# Altium PCB hub_6.PcbDoc
Units mil, origin at the board's own origin, x right, y up, seen from the top; angles counter-clockwise.
Board outline 6000 x 4000 mil, 2 copper layers (Top Layer, Bottom Layer); 138 components, 100 nets, 461 pads, 145 vias.
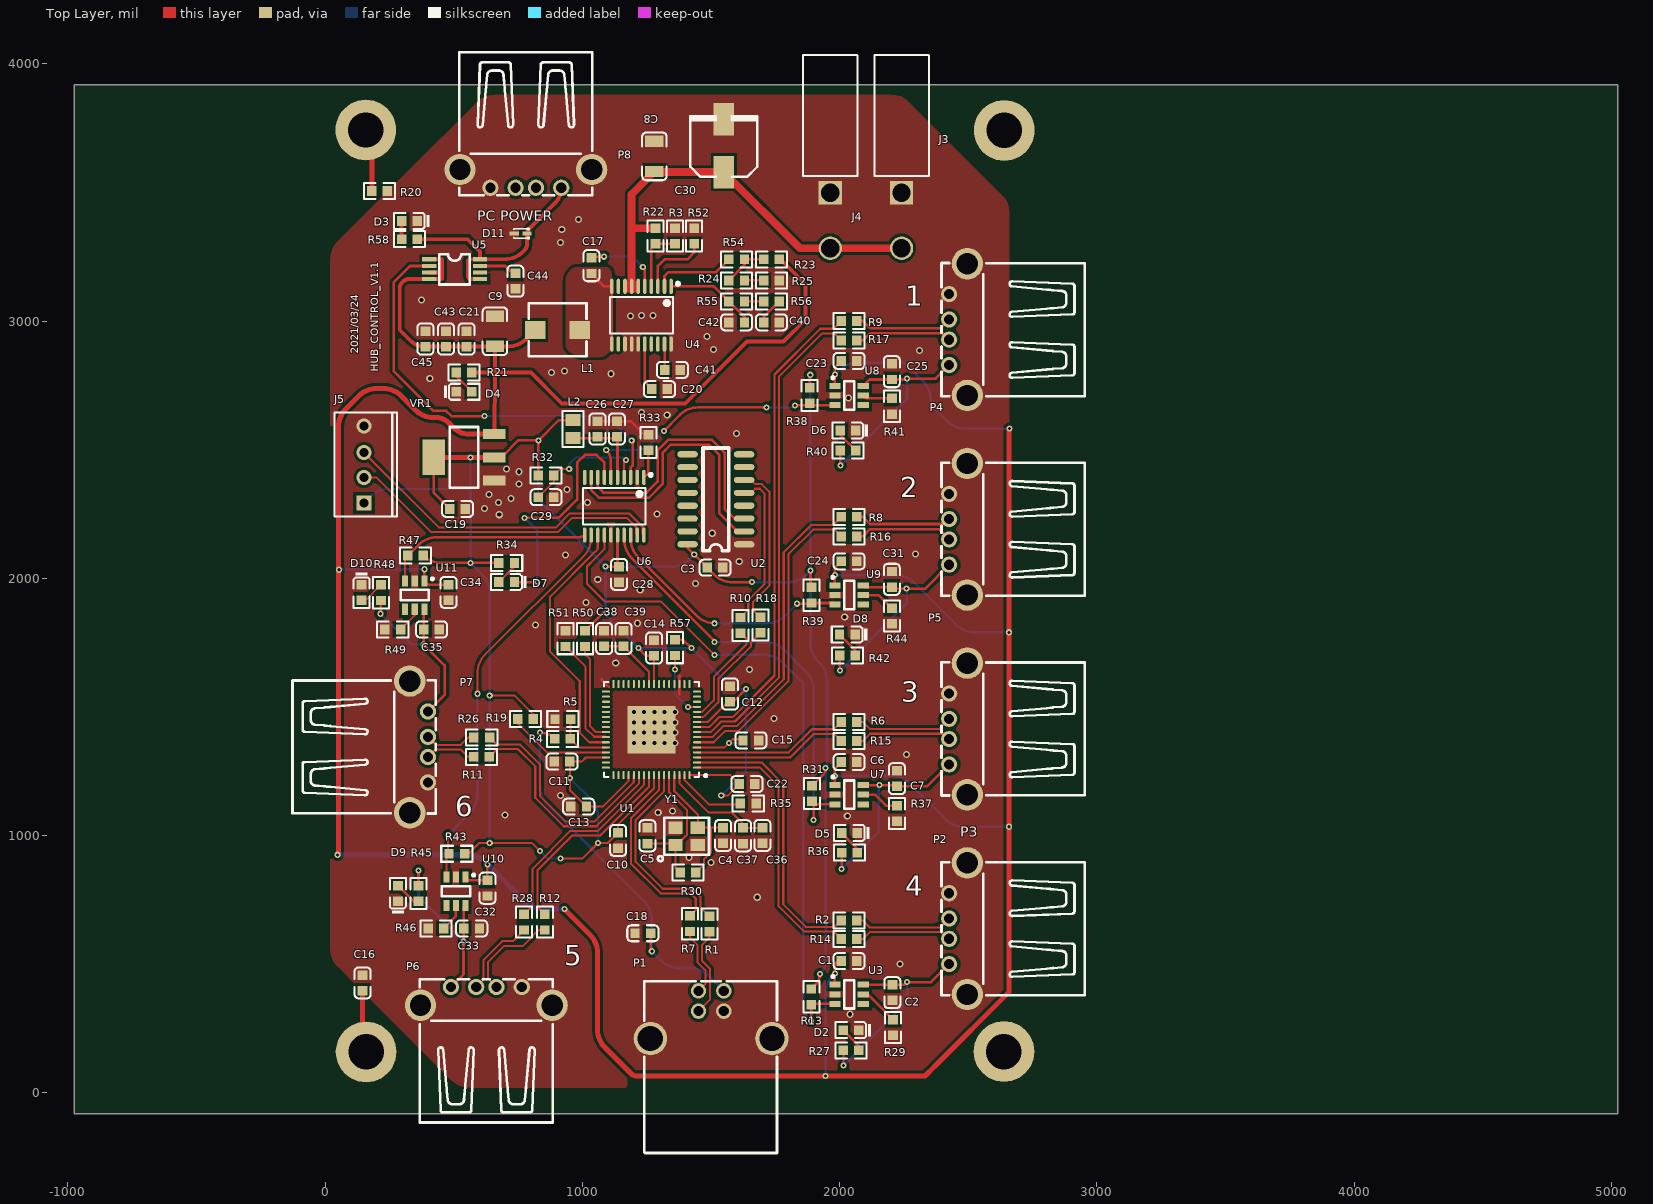
[diagram p0: Top Layer view]
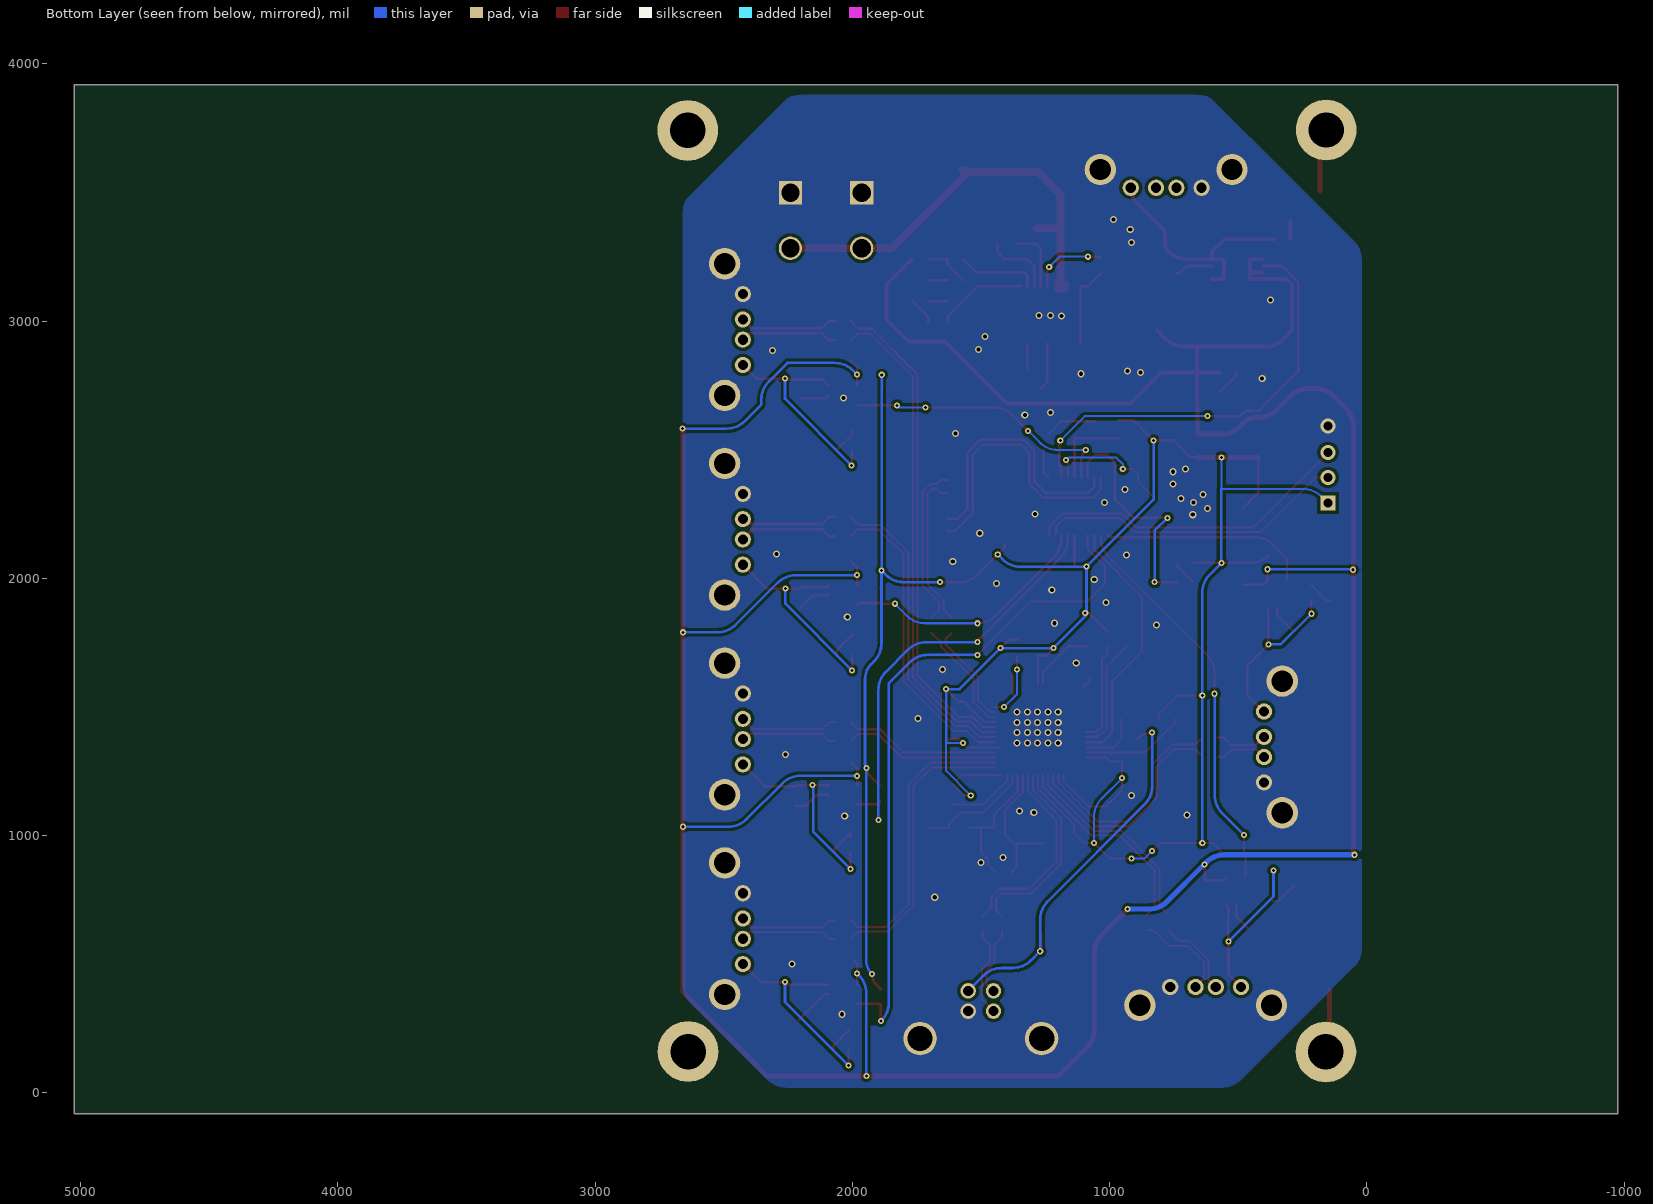
[diagram p1: Bottom Layer view, seen from below]
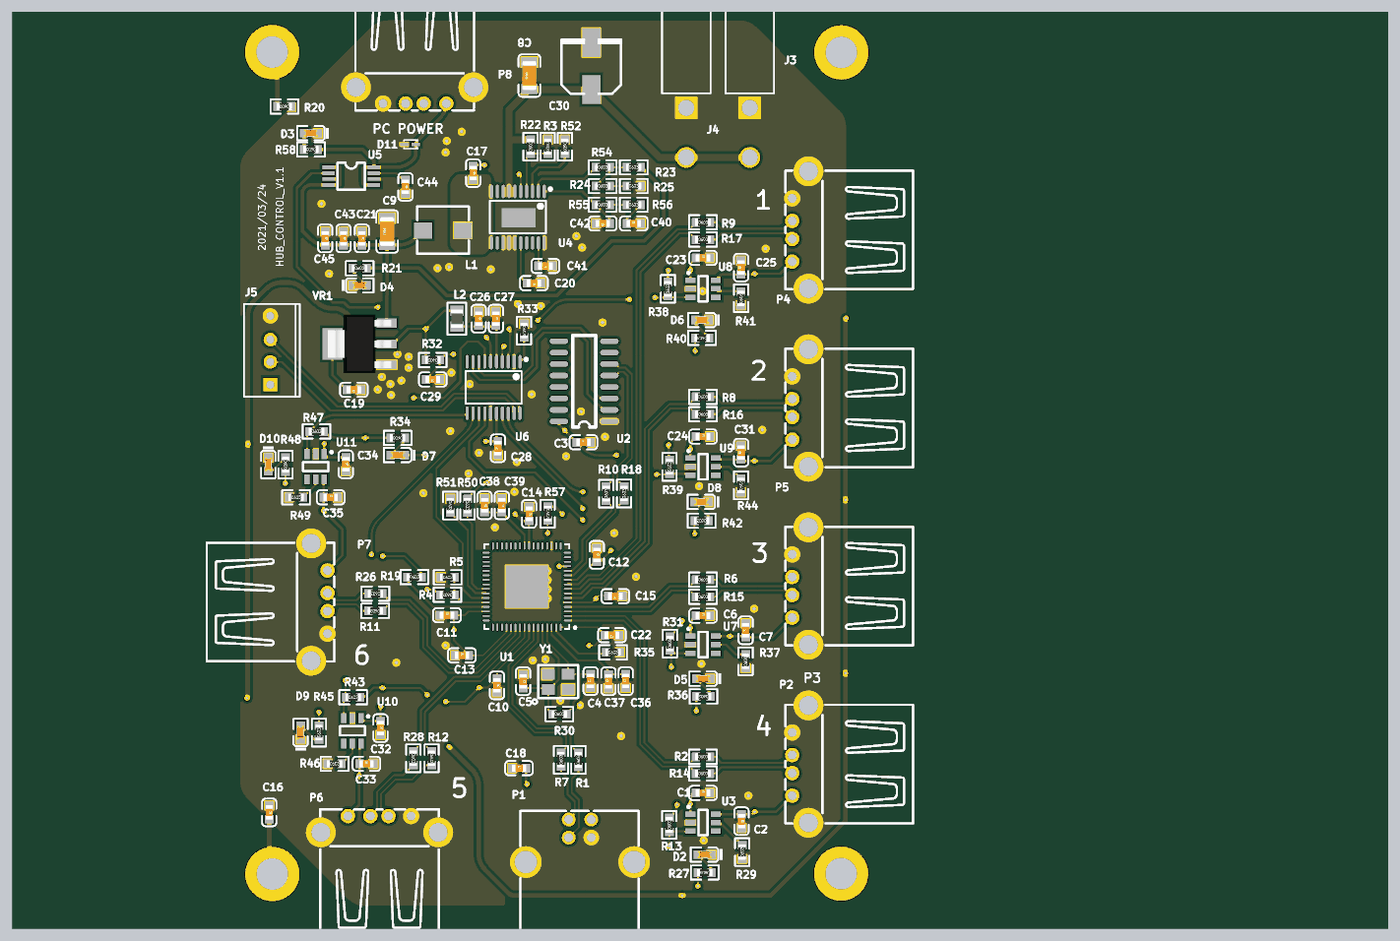
[diagram p2: 3D render of the assembled board from above, using the file's embedded part models]

## Layer stack, top to bottom
Top Layer: signal copper 1.4
Dielectric: dielectric 12.6, FR-4, Dk 4.8
Bottom Layer: signal copper 1.4

## Board outline
-975,-81 5025,-81 5025,3919 -975,3919

## Design rules (kind name [scope] priority, off if disabled: settings)
Clearance [InPolygon] p1: gap=12
Clearance Clearance_1 [All] p2: gap=10
PolygonConnect [All] p1: connectstyle=Direct reliefconductorwidth=10 reliefentries=2 polygonreliefangle="90 Angle"
RoutingVias [All] p1: holewidth=11.81 width=23.62 viastyle="Through Hole" minholewidth=11.81 minwidth=23.62 maxholewidth=28 maxwidth=50
SilkscreenOverComponentPads [All] p1: minsilkscreentomaskgap=10
SolderMaskExpansion [All] p1: expansion=4
Width [All] p1: maxlimit=50 minlimit=8 preferedwidth=8
27 further rules are at their usual default settings.

## Classes and differential pairs
component class RST_SER_1: C3 C8 C9 C16 C17 C19 C20 C21 C26 C27 C28 C29 C30 C40 C41 C42 C43 C44 C45 D3 D4 D7 D11 J3 J4 J5 L1 L2 P8 R3 R20 R21 R22 R23 R24 R25 R32 R33 R34 R52 R54 R55 R56 R58 U2 U4 U5 U6 VR1
component class USB2517: C1 C2 C4 C5 C6 C7 C10 C11 C12 C13 C14 C15 C18 C22 C23 C24 C25 C31 C32 C33 C34 C35 C36 C37 C38 C39 D2 D5 D6 D8 D9 D10 P1 P2 P3 P4 P5 P6 P7 R1 R2 R4 R5 R6 R7 R8 R9 R10 R11 R12 R13 R14 R15 R16 R17 R18 R19 R26 R27 R28 R29 R30 R31 R35 R36 R37 R38 R39 R40 R41 R42 R43 R44 R45 R46 R47 R48 R49 R50 R51 R57 U1 U3 U7 U8 U9 U10 U11 Y1

## Components (designator, comment, footprint, x,y, rotation, side; value= is the part's Value field where it differs from the comment)
C1 "100nF (104) 10% 50V" 0603_C 2037,512 r0 top
C2 "1uF (105) 10% 50V" 0603_C 2205,389 r270 top
C3 "100nF (104) 10% 50V" 0603_C 1516,2041 r0 top
C4 "33pF (330) 5% 50V" 0603_C 1547,1000 r90 top
C5 "33pF (330) 5% 50V" 0603_C 1253,999 r270 top
C6 "100nF (104) 10% 50V" 0603_C 2037,1285 r0 top
C7 "1uF (105) 10% 50V" 0603_C 2223,1221 r90 top
C8 "1uF  50V" 1206_C 1280,3640 r90 top
C9 "22UF/25V" 1206_C 660,2960 r90 top
C10 "100nF (104) 10% 50V" 0603_C 1139,981 r270 top
C11 "100nF (104) 10% 50V" 0603_C 921,1287 r0 top
C12 "100nF (104) 10% 50V" 0603_C 1574,1550 r270 top
C13 "100nF (104) 10% 50V" 0603_C 986,1112 r0 top
C14 "100nF (104) 10% 50V" 0603_C 1279,1729 r270 top
C15 "100nF (104) 10% 50V" 0603_C 1655,1370 r180 top
C16 "1uF (105) 10% 50V" 0603_C 146,427 r270 top
C17 "100nF (104) 10% 50V" 0603_C 1035,3215 r270 top
C18 "4.7uF (475) 10% 16V" 0603_C 1235,620 r0 top
C19 "100nF" 0603_C 515,2270 r180 top
C20 "1uF (105) 10% 50V" 0603_C 1300,2735 r180 top
C21 "10uF" 0603_C 550,2930 r270 top
C22 "100nF (104) 10% 50V" 0603_C 1640,1200 r180 top
C23 "100nF (104) 10% 50V" 0603_C 2037,2845 r0 top
C24 "100nF (104) 10% 50V" 0603_C 2037,2066 r0 top
C25 "1uF (105) 10% 50V" 0603_C 2203,2803 r90 top
C26 "100nF" 0603_C 1059,2580 r270 top
C27 "10uF" 0603_C 1134,2580 r270 top
C28 "100nF" 0603_C 1143,2015 r90 top
C29 "10nF" 0603_C 859,2315 r180 top
C30 "100uf" E_6.3*5.4 1550,3579 r90 top
C31 "1uF (105) 10% 50V" 0603_C 2203,1996 r90 top
C32 "100nF (104) 10% 50V" 0603_C 631,795 r270 top
C33 "1uF (105) 10% 50V" 0603_C 570,639 r0 top
C34 "100nF (104) 10% 50V" 0603_C 480,1945 r270 top
C35 "1uF (105) 10% 50V" 0603_C 414,1801 r0 top
C36 "100nF (104) 10% 50V" 0603_C 1700,1000 r90 top
C37 "1uF (105) 10% 50V" 0603_C 1625,999 r90 top
C38 "100nF (104) 10% 50V" 0603_C 1085,1766 r270 top
C39 "1uF (105) 10% 50V" 0603_C 1160,1766 r270 top
C40 "2.7nF (272) 10% 50V" 0603_C 1735,2995 r0 top
C41 "100nF (104) 10% 50V" 0603_C 1350,2810 r180 top
C42 "18pF (180) 5% 50V" 0603_C 1600,2995 r180 top
C43 "1uF (105) 10% 50V" 0603_C 470,2930 r270 top
C44 "220nF (224) 10% 25V" 0603_C 740,3155 r270 top
C45 "100nF (104) 10% 50V" 0603_C 390,2930 r270 top
D2 "绿灯 0603" 0603_LED_S1 2044,243 r180 top
D3 "绿灯 0603" 0603_LED_S1 328,3389 r180 top
D4 "红灯 0603" 0603_LED_S1 540,2725 r0 top
D5 "绿灯 0603" 0603_LED_S1 2038,1010 r180 top
D6 "绿灯 0603" 0603_LED_S1 2033,2574 r180 top
D7 "绿灯 0603" 0603_LED_S1 706,1985 r180 top
D8 "绿灯 0603" 0603_LED_S1 2030,1781 r180 top
D9 "绿灯 0603" 0603_LED_S1 283,775 r90 top
D10 "绿灯 0603" 0603_LED_S1 142,1944.69 r270 top
D11 "TVS" SOD-523 735,3340 r0 top
J3 "MOTOR" 5557 2241,3283 r90 top
J4 "MOTOR" 5557 1964,3283 r90 top
J5 "header4" xh-4 151,2292 r90 top
L1 "induct" L_SMD,5.7x5.2mm 990,2965 r180 top
L2 "1uH ±10%" 0805_L 964,2580 r270 top
P1 "USB1" USB-B-TH_USB-B01 1550,396 r180 top
P2 "USB1" "USB-A-TH_AF90-OFFSET - duplicate" 2426,500 r90 top
P3 "USB1" "USB-A-TH_AF90-OFFSET - duplicate" 2426,1276.33 r90 top
P4 "USB1" "USB-A-TH_AF90-OFFSET - duplicate" 2426,2829 r90 top
P5 "USB1" "USB-A-TH_AF90-OFFSET - duplicate" 2426,2052.67 r90 top
P6 "USB1" "USB-A-TH_AF90-OFFSET - duplicate" 489,411 r0 top
P7 "USB1" "USB-A-TH_AF90-OFFSET - duplicate" 400,1482 r270 top
P8 "USB1" "USB-A-TH_AF90-OFFSET - duplicate" 918,3518 r180 top
R1 "27Ω (27R0) ±1%" 0603_R 1494,656 r90 top
R2 "27Ω (27R0) ±1%" 0603_R 2037,670 r0 top
R3 "20KΩ (2002) ±1%" 0603_R 1360,3330 r270 top
R4 "100KΩ (1003) ±1%" 0603_R 923,1376 r180 top
R5 "100KΩ (1003) ±1%" 0603_R 924,1452 r0 top
R6 "27Ω (27R0) ±1%" 0603_R 2037,1442 r0 top
R7 "27Ω (27R0) ±1%" 0603_R 1418,657 r90 top
R8 "27Ω (27R0) ±1%" 0603_R 2037,2239 r0 top
R9 "27Ω (27R0) ±1%" 0603_R 2037,3000 r0 top
R10 "27Ω (27R0) ±1%" 0603_R 1615,1817 r90 top
R11 "27Ω (27R0) ±1%" 0603_R 608,1306 r180 top
R12 "27Ω (27R0) ±1%" 0603_R 854,663 r270 top
R13 "10KΩ (1002) ±1%" 0603_R 1890,373 r90 top
R14 "27Ω (27R0) ±1%" 0603_R 2037,597 r0 top
R15 "27Ω (27R0) ±1%" 0603_R 2037,1367 r0 top
R16 "27Ω (27R0) ±1%" 0603_R 2037,2163 r0 top
R17 "27Ω (27R0) ±1%" 0603_R 2037,2925 r0 top
R18 "27Ω (27R0) ±1%" 0603_R 1693,1817.68 r90 top
R19 "4.7KΩ (4701) ±1%" 0603_R 779,1453 r0 top
R20 "1MΩ (1004) ±1%" 0603_R 212,3505 r180 top
R21 "10KΩ" 0603_R 540,2800 r0 top
R22 "200KΩ (2003) ±1%" 0603_R 1285,3330 r90 top
R23 "20KΩ (2002) ±1%" 0603_R 1735,3240 r0 top
R24 "2.4KΩ (2401) ±1%" 0603_R 1600,3158.33 r0 top
R25 "2.2KΩ (2201) ±1%" 0603_R 1735,3158.33 r0 top
R26 "27Ω (27R0) ±1%" 0603_R 609,1381 r180 top
R27 "4.7KΩ (4701) ±1%" 0603_R 2045,165 r180 top
R28 "27Ω (27R0) ±1%" 0603_R 774,663 r270 top
R29 "27KΩ (2702) ±1%" 0603_R 2208,254 r90 top
R30 "1MΩ (1004) ±1%" 0603_R 1411,856 r0 top
R31 "10KΩ (1002) ±1%" 0603_R 1893,1163 r90 top
R32 "10KΩ" 0603_R 859,2400 r180 top
R33 "4.7KΩ (4701) ±1%" 0603_R 1257,2528 r270 top
R34 "4.7KΩ" 0603_R 706,2060 r180 top
R35 "12KΩ (1202) ±1%" 0603_R 1645,1125 r0 top
R36 "4.7KΩ (4701) ±1%" 0603_R 2039,933 r180 top
R37 "27KΩ (2702) ±1%" 0603_R 2223,1086 r90 top
R38 "10KΩ (1002) ±1%" 0603_R 1884,2710 r90 top
R39 "10KΩ (1002) ±1%" 0603_R 1891,1934 r90 top
R40 "4.7KΩ (4701) ±1%" 0603_R 2033,2496 r180 top
R41 "27KΩ (2702) ±1%" 0603_R 2203,2668.68 r90 top
R42 "4.7KΩ (4701) ±1%" 0603_R 2031,1699 r180 top
R43 "10KΩ (1002) ±1%" 0603_R 512,929 r0 top
R44 "27KΩ (2702) ±1%" 0603_R 2203,1853 r90 top
R45 "4.7KΩ (4701) ±1%" 0603_R 363,775 r90 top
R46 "27KΩ (2702) ±1%" 0603_R 431,639 r0 top
R47 "10KΩ (1002) ±1%" 0603_R 352,2088 r0 top
R48 "4.7KΩ (4701) ±1%" 0603_R 217,1943.69 r270 top
R49 "27KΩ (2702) ±1%" 0603_R 263,1801 r0 top
R50 "4.7KΩ (4701) ±1%" 0603_R 1010,1765 r270 top
R51 "4.7KΩ (4701) ±1%" 0603_R 935,1765 r270 top
R52 "56KΩ (5602) ±1%" 0603_R 1435,3330 r270 top
R54 "0Ω (0R0) ±1%" 0603_R 1600,3240 r0 top
R55 "3KΩ (3001) ±1%" 0603_R 1600,3076.67 r0 top
R56 "3KΩ (3001) ±1%" 0603_R 1735,3076.67 r0 top
R57 "4.7KΩ (4701) ±1%" 0603_R 1360,1730 r270 top
R58 "4.7KΩ (4701) ±1%" 0603_R 328,3318 r180 top
U1 "USB2517" QFN-64 1446,1264 r180 top
U2 "CH340C" SOP-16 1518,2257 r180 top
U3 "TPS2553DBVT" SOT-23-6 2067,345 r0 top
U4 "MP4575" TSSOP-20#1 1345,3135 r180 top
U5 "TPS22958DGKR" MSOP-8 405,3240 r0 top
U6 "STM32F030F4P6" TSSOP-20#2 1124,2280 r180 top
U7 "TPS2553DBVT" SOT-23-6 2067,1121 r0 top
U8 "TPS2553DBVT" SOT-23-6 2067,2673 r0 top
U9 "TPS2553DBVT" SOT-23-6 2067,1897 r0 top
U10 "TPS2553DBVT" SOT-23-6 471,753 r270 top
U11 "TPS2553DBVT" SOT-23-6 311,1905 r270 top
VR1 "ZLDO1117QG33TA" SOT-223 540,2470 r0 top
Y1 "OSC-24M" SMD-3225_4P 1418.49,990.01 r0 top

## Footprints (in the part's own frame and the unit in brackets; to place one, negate y for a bottom-side part, rotate by r counter-clockwise, add the part's x,y. Pads: shape width x height; smd on the part's side, far side on the other; paste and mask are expansions set on the pad)
0603_C [mm]
  rect 0.93x0.98 smd: 1(-0.77,0) 2(0.77,0)
  silkscreen extent -1.53,-0.79 1.54,0.79, body extent -0.8,-0.4 0.8,0.4, height 0.3
0603_LED_S1 [mm]
  rect 0.93x0.98 smd: A(0.77,0) K(-0.77,0)
  silkscreen extent -1.98,-0.79 1.54,0.79, body extent -0.8,-0.4 0.8,0.4, height 0.6
0603_R [mm]
  rect 0.93x0.98 smd: 1(-0.77,0) 2(0.77,0)
  silkscreen extent -1.53,-0.79 1.54,0.79, body extent -0.85,-0.4 0.85,0.4, height 0.56
0805_L [mm]
  rect 1.16x1.47 smd: 1(-0.89,0) 2(0.89,0)
  silkscreen extent -1.77,-1.04 1.77,1.03, body extent -1.02,-0.64 1.03,0.64, height 0.6
1206_C [mm]
  rect 1.13x1.8 smd: 1(-1.49,0) 2(1.49,0)
  silkscreen extent -2.36,-1.2 2.35,1.2, body extent -1.6,-0.81 1.6,0.79, height 1
5557 [mm]
  rect 2.3x2.3 hole 1.8: 1(5.486,0)
  round 2.3 hole 1.8: 2(0,0)
  silkscreen extent 7.11,-2.69 19.1,2.69
E_6.3*5.4 [mm]
  rect 3.2x2 smd: 1(0,0) 2(5.207,0)
  silkscreen extent -0.47,-3.3 5.53,3.3
L_SMD,5.7x5.2mm [mm]
  rect 2x1.8 smd: 1(0,0) 2(4.4,0)
  silkscreen extent -0.66,-2.64 5.05,2.6
MSOP-8 [mil]
  rect 55x16 smd: 1(0,0) 2(0,-26) 3(0,-51) 4(0,-77) 5(197,-77) 6(197,-51) 7(197,-26) 8(197,0)
  silkscreen extent 39,-98 158,20
QFN-64 [mm]
  oval 0.8x0.2 smd: 1(0,0) 2(0,-0.5) 3(0,-1) 4(0,-1.5) 5(0,-2) 6(0,-2.5) 7(0,-3) 8(0,-3.5) 9(0,-4) 10(0,-4.5) 11(0,-5) 12(0,-5.5) 13(0,-6) 14(0,-6.5) 15(0,-7) 16(0,-7.5) 33(9,-7.5) 34(9,-7) 35(9,-6.5) 36(9,-6) 37(9,-5.5) 38(9,-5) 39(9,-4.5) 40(9,-4) 41(9,-3.5) 42(9,-3) 43(9,-2.5) 44(9,-2) 45(9,-1.5) 46(9,-1) 47(9,-0.5) 48(9,0)
  oval 0.2x0.8 smd: 17(0.75,-8.25) 18(1.25,-8.25) 19(1.75,-8.25) 20(2.25,-8.25) 21(2.75,-8.25) 22(3.25,-8.25) 23(3.75,-8.25) 24(4.25,-8.25) 25(4.75,-8.25) 26(5.25,-8.25) 27(5.75,-8.25) 28(6.25,-8.25) 29(6.75,-8.25) 30(7.25,-8.25) 31(7.75,-8.25) 32(8.25,-8.25) 49(8.25,0.75) 50(7.75,0.75) 51(7.25,0.75) 52(6.75,0.75) 53(6.25,0.75) 54(5.75,0.75) 55(5.25,0.75) 56(4.75,0.75) 57(4.25,0.75) 58(3.75,0.75) 59(3.25,0.75) 60(2.75,0.75) 61(2.25,0.75) 62(1.75,0.75) 63(1.25,0.75) 64(0.75,0.75)
  rect 4.7x4.7 smd: 65(4.5,-3.75)
  silkscreen extent -0.98,-8.45 9.2,0.95, body extent -0.05,-8.3 9.05,0.8, height 1
SMD-3225_4P [mm]
  rect 1.4x1.2 smd: 1(-1.425,-0.686) 2(0.775,-0.686) 3(0.775,1.014) 4(-1.425,1.014)
  silkscreen extent -3.17,-2.29 1.88,2.01
SOD-523 [mm]
  rect 0.93x0.36 smd: 1(0,0) 2(1.27,0)
  silkscreen extent -0.04,-0.55 1.54,0.55
SOP-16 [mil]
  oval 80x24 smd: 1(-111,125) 2(-111,75) 3(-111,25) 4(-111,-25) 5(-111,-75) 6(-111,-125) 7(-111,-175) 8(-111,-225) 9(109,-225) 10(109,-175) 11(109,-125) 12(109,-75) 13(109,-25) 14(109,25) 15(109,75) 16(109,125)
  silkscreen extent -51,-250 49,150
SOT-23-6 [mm]
  rect 1.1x0.6 smd: 1(-2.159,1.905) 2(-2.159,0.955) 3(-2.159,0.005) 4(0.641,0.005) 5(0.641,0.955) 6(0.641,1.905)
  silkscreen extent -2.48,-0.45 -0.26,2.83
SOT-223 [mm]
  rect 2.2x1 smd: 1(3,-2.3) 2(3,0) 3(3,2.3)
  rect 2.2x3.5 smd: 2(-3,0)
  silkscreen extent -1.4,-3 1.4,3, body extent -3.49,-3.24 3.49,3.24, height 1.64
TSSOP-20#1 [mm]
  oval 0.35x1.5 smd: 1(0,0) 2(0.65,0) 3(1.3,0) 4(1.95,0) 5(2.6,0) 6(3.25,0) 7(3.9,0) 8(4.55,0) 9(5.2,0) 10(5.85,0) 11(5.85,5.7) 12(5.2,5.7) 13(4.55,5.7) 14(3.9,5.7) 15(3.25,5.7) 16(2.6,5.7) 17(1.95,5.7) 18(1.3,5.7) 19(0.65,5.7) 20(0,5.7)
  silkscreen extent -0.83,-0.4 6.02,4.65
TSSOP-20#2 [mm]
  oval 0.35x1.5 smd: 1(-2.925,-2.85) 2(-2.275,-2.85) 3(-1.625,-2.85) 4(-0.975,-2.85) 5(-0.325,-2.85) 6(0.325,-2.85) 7(0.975,-2.85) 8(1.625,-2.85) 9(2.275,-2.85) 10(2.925,-2.85) 11(2.925,2.85) 12(2.275,2.85) 13(1.625,2.85) 14(0.975,2.85) 15(0.325,2.85) 16(-0.325,2.85) 17(-0.975,2.85) 18(-1.625,2.85) 19(-2.275,2.85) 20(-2.925,2.85)
  silkscreen extent -3.75,-3.25 3.1,1.8
"USB-A-TH_AF90-OFFSET - duplicate" [mm]
  round 3.1 hole 2.1: 0(-3,-1.8) 0(10,-1.8)
  round 1.6 hole 1: 1(0,0) 2(2.5,0) 3(4.5,0) 4(7,0)
  silkscreen extent -3.07,-13.38 10.07,0.75
USB-B-TH_USB-B01 [mm]
  round 3.3 hole 2.5: 0(-4.75,4.71) 0(7.25,4.71)
  round 1.524 hole 1: 1(0,0) 2(2.5,0) 3(2.5,2) 4(0,2)
  silkscreen extent -5.25,-0.95 7.85,16.01
xh-4 [mm]
  rect 1.5x1.5 hole 0.9: 1(0,0)
  round 1.5 hole 0.9: 2(2.525,0) 3(5,0) 4(7.62,0)
  silkscreen extent -1.32,-3.25 8.94,2.92

## Part data
C1 C3 C6 C10 C11 C12 C13 C14 C15 C17 C19 C22 C23 C24 C26 C28 C32 C34 C36 C38 C41 C45: library part "0603 100nF (104) 10% 50V"
C2 C7 C16 C20 C25 C31 C33 C35 C37 C39 C43: library part "0603 1uF (105) 10% 50V"
C4 C5: library part "0603 33pF (330) 5% 50V"
C8: library part "1206 1uF (105) 10% 50V"
C9: library part "1206 10uF (106) 10% 50V"
C18: library part "0603 4.7uF (475) 10% 16V"
C21 C27: library part "0603 10uF (106) 10% 10V"
C29: library part "0603 10nF (103) 10% 50V"
C40: library part "0603 2.7nF (272) 10% 50V"
C42: library part "0603 18pF (180) 5% 50V"
C44: library part "0603 220nF (224) 10% 25V"
D2 D3 D4 D5 D6 D7 D8 D9 D10: library part 0603
L2: library part "0805 100uH 10%", "Ì"
R1 R2 R6 R7 R8 R9 R10 R11 R12 R14 R15 R16 R17 R18 R26 R28: library part "0603 27Ω (27R0"
R3 R23: library part "0603 20KΩ (2002"
R4 R5: library part "0603 100KΩ (1003"
R13 R21 R31 R32 R38 R39 R43 R47: library part "0603 10KΩ (1002"
R19 R27 R33 R36 R40 R42 R45 R48 R50 R51 R57 R58: library part "0603 4.7KΩ (4701"
R20 R30: library part "0603 1MΩ (1004"
R22: library part "0603 200KΩ (2003"
R24: library part "0603 2.4KΩ (2401"
R25: library part "0603 2.2KΩ (2201"
R29 R37 R41 R44 R46 R49: library part "0603 27KΩ (2702"
R34: library part "0603 1KΩ (1001"
R35: library part "0603 12KΩ (1202"
R52: library part "0603 56KΩ (5602"
R54: library part "0603 0Ω (0R0"
R55 R56: library part "0603 3KΩ (3001"
U3 U7 U8 U9 U10 U11: library part TP
U6: library part STM32F030F
VR1: library part "SOT-223 AMS1117-3.3", "µÍÑ¹²"

## Free pads (board coordinates)
  round 236.22 hole 137.8: 0(158.48,3742.52) 0(159.48,158.48) 0(2639,160) 0(2640,3741)

## Via types
v1: diameter 27.56, hole 15.75, Top Layer to Bottom Layer, 74 vias
v2: diameter 23.62, hole 11.81, Top Layer to Bottom Layer, 71 vias

## Nets (pads, with @x,y where several pads share a name; then routed paths per layer and width w, separated by ;. In a path a pad name is that pad's centre, name@x,y a point inside that pad or via, vN(x,y) a via of type N, cw(c..) or ccw(c..) an arc to the next point about the centre after c; other vN are vias at no path point)
GND: C1.2 C2.2 C3.2 C4.1 C5.1 C6.2 C7.2 C8.2 C9.2 C10.2 C11.1 C12.1 C13.1 C14.1 C15.1 C16.1 C18.1 C19.1 C20.1 C21.1 C22.1 C23.2 C24.2 C25.2 C26.1 C27.1 C28.1 C29.1 C30.2 C31.2 C32.2 C33.2 C34.2 C35.2 C36.1 C37.1 C38.1 C39.1 C40.2 C41.1 C42.2 C43.1 C44.2 C45.1 D2.K D3.K D4.K D5.K D6.K D8.K D9.K D10.K D11.1 J3.1 J4.1 J5.4 P1.0 P1.4 P2.0 P2.4 P3.0 P3.4 P4.0 P4.4 P5.0 P5.4 P6.0 P6.4 P7.0 P7.4 P8.0 P8.4 R3.1 R5.1 R20.1 R25.2 R29.1 R33.1 R35.2 R37.1 R41.1 R44.1 R46.1 R49.1 R51.1 R52.1 U1.19 U1.65 U2.1 U3.2 U4.13 U4.14 U4.15 U4.20 U5.6 U6.2 U6.15 U7.2 U8.2 U9.2 U10.2 U11.2 VR1.1 Y1.2 Y1.4 | length 315.2
  Top Layer w8: C26.1 C27.1 1189,2610.32 R33.1@1239,2560.31
  Top Layer w10: 1075,1610 1075,1605.47 1102.26,1578.21 ; 1377,1549 1377.1,1549.1 U1.19 1377.1,1619.1 1378,1620
  other v1: 2040,305 2235,500 1680,760 1500,895 1415,915 2030,1075 700,1080 1295,1090 1350,1095 915,1155 2260,1315 1200,1360 1240,1360 1280,1360 1320,1360 1360,1360 1200,1400 1240,1400 1280,1400 1320,1400 1360,1400 1200,1440 1240,1440 1280,1440 1320,1440 1360,1440 1745,1455 1200,1480 1240,1480 1280,1480 1320,1480 1360,1480 1650,1645 1130,1670 818,1819 1215,1825 2020,1850 1015,1905 1225,1955 1440,1980 1060,1995 1610,2065 935,2090 2295,2095 1505,2175 677,2247 1290,2250 619,2271 674,2295 1020,2295 722,2310 637,2326 940,2345 754,2366 754,2414 705,2425 1599,2563 1330,2635 1230,2645 2035,2700 407,2776 1112,2795 880,2800 930,2805 2310,2885 1510,2890 1485,2940 1188,3020 1230,3021 1275,3021 374,3081 915,3305 920,3355 985,3395
GND_PAD0: pad.0@158.48,3742.52 R20.2 | length 243.7
  Top Layer w20: pad.0@158.48,3742.52 cw(c102.46,3686.5) 181.68,3686.5 R20.2
GND_PAD1: C16.2 pad.0@159.48,158.48 | length 241.8
  Top Layer w20: C16.2 146,191.02 ccw(c192.02,191.02) pad.0@159.48,158.48
LED1: D7.K U6.7 | length 932.8
  Top Layer w10: D7.K 820,1985 825,1980 v2(825,1985) ; v2(775,2235) 907.67,2235 943.67,2271 945,2271 980,2306 980,2450 1010,2480 1055,2480 1085.61,2449.39 U6.7
  Bottom Layer w10: v2(775,2235) 825,2185 v2(825,1985)
NetC4_2: C4.2 R30.2 U1.61 Y1.3 | length 539.3
  Top Layer w8: U1.61 1357.42,1173.04 1449,1081.46 Y1.3 1449.39,1030.32 1500,1030.32 ; R30.2 1472.22,886.91 1472.22,906.51 1500,934.29 1500,1030.32 ; C4.2 1500,1030.32
NetC5_2: C5.2 R30.1 U1.60 Y1.1 | length 547.7
  Top Layer w8: C5.2 1356.7,968.68 Y1.1 ; U1.60 1337.73,1167.27 1407.44,1097.56 1407.44,1004 1366.44,963 Y1.1 ; R30.1 1362.39,874.3 Y1.1
NetC17_1: C17.1 U4.5 | length 296.7
  Top Layer w10: C17.1 1039.68,3250 v2(1085,3250) ; v2(1235,3210) 1242.64,3202.36 U4.5
  Bottom Layer w8: v2(1085,3250) 1195,3250 v2(1235,3210)
NetC17_2: C17.2 L1.1 U4.10 U4.11 | length 324.7
  Top Layer w10: C17.2 1084.68,3135 U4.10 U4.11
NetC20_2: C20.2 U4.16 | length 186.8
  Top Layer w10: U4.16 1242.64,2762.05 C20.2
NetC40_1: C40.1 R56.2 | length 106.8
  Top Layer w10: C40.1 1704.68,3016.04 R56.2
NetC41_2: C41.2 U4.19 | length 100.7
  Top Layer w10: U4.19 1319.68,2910.32 C41.2
NetC42_1: C42.1 R55.1 U4.1 | length 355.6
  Top Layer w10: U4.1 1511.35,3135 R55.1 1630.32,3016.04 C42.1
NetC44_1: C44.1 U5.7 | length 149.9
  Top Layer w10: U5.7 701,3214 729.68,3185.31 C44.1
NetD2_A: D2.A R27.1 | length 103.5
  Top Layer w10: D2.A 2075.31,181.37 R27.1
NetD3_A: D3.A R58.2 | length 71
  Top Layer w15: R58.2 D3.A
NetD4_A: D4.A R21.1 | length 100.1
  Top Layer w10: R21.1 509.69,2785.63 D4.A
NetD5_A: D5.A R36.1 | length 117.9
  Top Layer w8: D5.A@2007.68,994.63 D5.A
  Top Layer w10: D5.A 2069.31,948.37 R36.1
NetD6_A: D6.A R40.1 | length 103.1
  Top Layer w10: D6.A 2002.68,2556.63 R40.1
NetD7_A: D7.A R34.1 | length 100.1
  Top Layer w8: D7.A 736.31,2045.63 R34.1
NetD8_A: D8.A R42.1 | length 107.5
  Top Layer w10: D8.A 2061.31,1719.37 R42.1
NetD9_A: D9.A R45.1 | length 105.1
  Top Layer w10: D9.A 343.63,744.69 R45.1
NetD10_A: D10.A R48.1 | length 99.7
  Top Layer w8: D10.A 157.37,1914.37 R48.1
NetR1_2: R1.2 U1.59 | length 781.3
  Top Layer w8: U1.59 1318.05,1171.39 1207,1060.34 1207,898 1312,793 1428.46,793 1459,762.46 1459,721.32 R1.2
NetR2_1: R2.1 U1.2 | length 1109.4
  Top Layer w8: U1.2 1696.77,1283.68 1781,1199.46 1781,732 1868,645 1981.69,645 R2.1
NetR3_2: R3.2 R22.1 U4.4 | length 246.6
  Top Layer w10: U4.4 1268.23,3282.91 R22.1 R3.2
NetR6_1: R6.1 U1.4 | length 610
  Top Layer w8: U1.4 1803.06,1323.06 1893,1413 1977.69,1413 R6.1
NetR7_2: R7.2 U1.58 | length 774.6
  Top Layer w8: U1.58 1298.36,1177.16 1189,1067.8 1189,890.54 1304.54,775 1421,775 1441,755 1441,710.32 R7.2
NetR8_1: R8.1 U1.7 | length 1204.7
  Top Layer w8: U1.7 1505.11,1382.11 1548,1425 1601,1425 1783,1607 1783,2100.46 1889.54,2207 1974.69,2207 R8.1
NetR9_1: R9.1 U1.9 | length 1900
  Top Layer w8: U1.9 1493.57,1421.48 1533.09,1461 1586.09,1461 1747,1621.91 1747,2792 1925,2970 1976.69,2970 R9.1
NetR10_1: R10.1 U1.12 | length 406.9
  Top Layer w8: U1.12 1466,1480.54 1511,1525.54 1511,1616.46 1638,1743.46 1638,1763.69 R10.1
NetR11_1: R11.1 U1.54 | length 891.2
  Top Layer w8: R11.1 668.31,1336 750,1336 817,1269 817,1146.54 927.54,1036 1054.09,1036 1219.62,1201.53 U1.54
NetR12_1: R12.1 U1.56 | length 796.2
  Top Layer w8: R12.1 825,722.31 825,864 961,1000 1069,1000 1258.99,1189.99 U1.56
NetR14_1: R14.1 U1.1 | length 1110.8
  Top Layer w8: U1.1 1691,1264 1763,1192 1763,724.54 1860.54,627 1976.69,627 R14.1
NetR15_1: R15.1 U1.3 | length 610.2
  Top Layer w8: U1.3 1808.83,1303.37 1900.46,1395 1978.69,1395 R15.1
NetR16_1: R16.1 U1.6 | length 1202.9
  Top Layer w8: U1.6 1510.88,1362.43 1555.46,1407 1608.46,1407 1801,1599.54 1801,2093 1897,2189 1980.69,2189 R16.1
NetR17_1: R17.1 U1.8 | length 1899.4
  Top Layer w8: U1.8 1499.34,1401.8 1540.54,1443 1593.54,1443 1765,1614.46 1765,2784.54 1932.46,2952 1979.69,2952 R17.1
NetR18_1: R18.1 U1.11 | length 445.5
  Top Layer w8: U1.11 1471.77,1460.85 1529,1518.08 1529,1609 1656,1736 1656,1753 1668,1765 1670.63,1765 R18.1
NetR19_1: R19.1 U1.45 | length 406.6
  Top Layer w8: R19.1 748.69,1436.31 861.94,1323.06 U1.45
NetR23_1: R23.1 R24.1 R54.2 | length 181.2
  Top Layer w10: R24.1 1630.32,3218.96 R54.2 R23.1
NetR24_2: R24.2 R25.1 | length 74.4
  Top Layer w10: R24.2 R25.1
NetR26_1: R26.1 U1.53 | length 858.5
  Top Layer w8: R26.1 666.31,1354 757.46,1354 835,1276.46 835,1154 935,1054 1046.63,1054 1199.94,1207.3 U1.53
NetR28_1: R28.1 U1.55 | length 797.2
  Top Layer w8: R28.1 807,726.31 807,871.46 953.54,1018 1061.54,1018 1239.31,1195.76 U1.55
NetR29_2: R29.2 U3.5 | length 156.5
  Top Layer w10: U3.5 2109.72,382.6 R29.2
NetR33_2: R33.2 U6.1 | length 112.9
  Top Layer w10: U6.1 1257,2410.05 R33.2
NetR35_1: R35.1 U1.63 | length 277.6
  Top Layer w8: U1.63 1396.79,1216.98 1493.77,1120 1609.69,1120 R35.1
NetR37_2: R37.2 U7.5 | length 148.3
  Top Layer w10: U7.5 2137.4,1158.6 2179.68,1116.32 R37.2
NetR41_2: R41.2 U8.5 | length 115.6
  Top Layer w10: U8.5 2102.83,2700.01 2201.99,2700.01 R41.2
NetR44_2: R44.2 U9.5 | length 132
  Top Layer w10: U9.5 2151.72,1934.6 R44.2
NetR46_2: R46.2 U10.5 | length 108.3
  Top Layer w10: R46.2 508.6,686.28 U10.5
NetR49_2: R49.2 U11.5 | length 101.7
  Top Layer w8: R49.2 348.6,1856.28 U11.5
NetR50_2: R50.2 U1.41 | length 389.3
  Top Layer w8: R50.2 1010,1705 1030,1685 1030,1425 1053.2,1401.8 U1.41
NetR51_2: R51.2 U1.42 | length 443.4
  Top Layer w8: R51.2 1012,1657.68 1012,1417.54 1045.75,1383.8 1089.98,1383.8 U1.42
NetR52_2: R52.2 U4.3 | length 274.5
  Top Layer w10: U4.3 1293.82,3213.82 1320,3240 1408,3240 1434.37,3266.37 R52.2@1434.37,3299.68
NetR54_1: R54.1 U4.2 | length 316.9
  Top Layer w10: U4.2 1319.41,3174.41 1335,3190 1519.69,3190 R54.1
NetR55_2: R55.2 R56.1 | length 74.4
  Top Layer w10: R55.2 R56.1
NetR57_2: R57.2 U1.13 | length 256.5
  Top Layer w8: v2(1360,1645) R57.2 ; v2(1410,1500) 1445.78,1500 U1.13
  Bottom Layer w8: v2(1360,1645) 1360,1550 v2(1410,1500)
NRST: C29.2 R32.1 U6.4 | length 503.8
  Top Layer w8: C29.2 889.31,2375.63 R32.1 914.31,2425 v2(949,2425) ; U6.4 1162.39,2453.39 v2(1169,2460)
  Bottom Layer w8: v2(949,2425) 949,2444 974,2469 1160,2469 v2(1169,2460)
PC_ON: U5.2 U6.3 | length 1694
  Top Layer w10: U5.2 330.8,3214 266.53,3149.73 266.53,2806.47 422.16,2650.84 470.7,2650.84 491.54,2630 v2(620,2630) ; U6.3 1187.98,2429.98 1195.81,2437.81 1195.81,2503.81 1196,2504 1196,2531 v2(1192,2535)
  Bottom Layer w8: v2(620,2630) 1097,2630 v2(1192,2535)
RESET_N: U1.43 U6.13 | length 1009.7
  Top Layer w8: 1043.38,2096.27 1043.35,2096.3 1042.96,2096.3 ; U6.13 1060.02,2113.37 1042.96,2096.3 ; U1.43 1027.57,1362.43 990,1400 990,1600 875,1715 875,1928.34 1042.96,2096.3
RX: U2.2 U6.9 | length 1085.6
  Top Layer w10: U6.9 1034.43,2342.57 1064,2313 1258.28,2313 1313,2367.72 1313,2488.72 1343.28,2519 1493.72,2519 1533,2479.72 1533,2252 1603,2182 U2.2
SWCLK: J5.3 U6.20 | length 1282.3
  Top Layer w8: J5.3 442.27,2197.58 442.56,2197.58 442.77,2197.37 448.5,2197.37 448.87,2197 896.54,2197 951.54,2252 1181.54,2252 1234.46,2199.09 1234.46,2172.5 U6.20
SWDIO: J5.2 U6.19 | length 1216.9
  Top Layer w8: J5.2 200.59,2391.41 413,2179 413.5,2179 414.08,2179.58 435.11,2179.58 435.11,2179.37 441.05,2179.37 441.42,2179 904,2179 959,2234 1173.95,2234 1208.87,2199.09 1208.87,2172.5 U6.19
TX: U2.3 U6.8 | length 1026.4
  Top Layer w10: U6.8 1060.02,2354.98 1082,2333 1250,2333 1293,2376 1293,2497 1335,2539 1502,2539 1553,2488 1553,2270 1591,2232 U2.3
USB+5V: C18.2 P1.1 R4.2 | length 1492.1
  Top Layer w10: v2(835,1400) cw(c835,1318.68) 892.5,1376.18 R4.2 ; C18.2 1265.32,561.31 ccw(c1281.31,561.31) v2(1270,550)
  Bottom Layer w10: v2(835,1400) 835,1191.42 ccw(c935,1191.42) 864.29,1120.71 1240.71,744.29 cw(c1170,673.58) 1270,673.58 v2(1270,550) 1305.71,514.29 ccw(c1376.42,585) 1376.42,485 1419.58,485 cw(c1419.58,385) 1490.29,455.71 P1.1
USB_DET: R4.1 R5.2 U1.44 | length 228.5
  Top Layer w8: R5.2 953.31,1451 R4.1 986.57,1342.74 U1.44
USB_EX1_5V: C2.1 P2.1 R27.2 U3.6 | length 852.9
  Top Layer w8: R27.2 2014.68,106.32 v2(2015,106)
  Top Layer w10: U3.6 2092.92,419.32 C2.1 2251.31,419.32 v2(2262,430) 2356,430 P2.1
  Bottom Layer w10: v2(2015,106) 2262,353 v2(2262,430)
USB_EX1_EN: R13.1 U3.3 U6.14 | length 2691.8
  Top Layer w8: U6.14 1085.61,2113.04 1050.84,2078.27 1050.38,2078.27 1018,2045.89 1018,1978 1086,1910 1305,1910 v2(1513,1702)
  Top Layer w10: v2(1889,279) ccw(c1886.59,281.41) 1890,281.41 R13.1 cw(c1896.06,336.62) 1896.06,345.2 U3.3
  Bottom Layer w10: v2(1513,1702) 1706.58,1702 cw(c1706.58,1602) 1777.29,1672.71 1858,1592 1858,351.42 ccw(c1958,351.42) 1887.29,280.71 v2(1889,279)
USB_EX2_5V: C7.1 P3.1 R36.2 U7.6 | length 822.6
  Top Layer w8: v2(2008,870) v2@2008.68,870.68 ; C7.1@2217.69,1196 C7.1
  Top Layer w10: v2(2008,870) 2008,932.32 R36.2 ; U7.6 v2(2154.96,1196) C7.1@2217.69,1196 ; C7.1 2340.35,1190.68 P3.1
  Bottom Layer w10: v2(2008,870) 2153,1015 2153,1194.04 v2(2154.96,1196)
USB_EX2_EN: R31.1 U6.17 U7.3 | length 1706.6
  Top Layer w10: U6.17 1162.39,2150.04 ccw(c1262.39,2150.04) 1191.68,2079.33 ; 1191.68,2079.32 1508.76,1762.24 cw(c1498.51,1752) v2(1513,1752) ; v2(1899,1061) 1899,1118.2 ccw(c1878.51,1118.2) R31.1 1904.49,1121.2 U7.3
  Bottom Layer w10: v2(1513,1752) 1712.58,1752 cw(c1712.58,1652) 1783.29,1722.71 1869.71,1636.29 cw(c1799,1565.58) 1899,1565.58 v2(1899,1061)
USB_EX3_5V: C31.1 P5.1 R42.2 U9.6 | length 859.9
  Top Layer w10: R42.2 2000.68,1642.32 v2(2001,1642) ; U9.6 2098.55,1965.68 2197,1965.68 2202.69,1960 v2(2261,1960) 2333.33,1960 P5.1
  Bottom Layer w10: v2(2001,1642) 2261,1902 v2(2261,1960)
USB_EX3_EN: R39.1 U6.18 U9.3 | length 995.3
  Top Layer w10: U6.18 1187.98,2152.73 ccw(c1287.98,2152.73) 1217.27,2082.02 1446.2,1853.08 ccw(c1514,1920.88) v2(1514,1825) ; v2(1835,1901) 1884.52,1901 ccw(c1884.52,1910.17) R39.1 1975.51,1903.69 U9.3
  Bottom Layer w8: v2(1514,1825) 1717.58,1825 ccw(c1717.58,1925) 1788.29,1854.29 v2(1835,1901) v2@1831,1901
USB_EX4_5V: C25.1 P4.1 R40.2 U8.6 | length 868.7
  Top Layer w10: R40.2 2002.68,2439.32 v2(2003,2439) ; U8.6 2116.92,2772.68 C25.1 2258.69,2772.68 v2(2262,2776) 2373,2776 P4.1
  Bottom Layer w10: v2(2003,2439) 2262,2698 v2(2262,2776)
USB_EX4_EN: R38.1 U6.6 U8.3 | length 1076.2
  Top Layer w10: v2(1093,2499) cw(c1049.05,2455.05) 1111.2,2455.05 U6.6 ; v2(1317,2573) 1378.71,2634.71 cw(c1449.42,2564) 1449.42,2664 v2(1716,2664) v2@1716,2666 ; v2(1827,2672) 1887.6,2672 ccw(c1887.6,2676.09) R38.1@1890.49,2673.2 ; R38.1 R38.1@1890.49,2673.2 ; U8.3 R38.1@1890.49,2673.2
  Bottom Layer w8: v2(1093,2499) 1201.58,2499 ccw(c1201.58,2599) 1272.29,2528.29 v2(1317,2573) ; v2(1716,2664) 1814.93,2664 ccw(c1814.93,2681.07) 1827,2669 v2(1827,2672)
USB_EX5_5V: C35.1 P7.1 R48.2 U11.6 | length 728
  Top Layer w10: v2(216,1862) 217,1863 R48.2 ; U11.6 383.68,1877.45 C35.1 383.68,1743.68 v2(383,1743) 465,1661 465,1547 P7.1
  Bottom Layer w10: v2(216,1862) 335,1743 v2(383,1743)
USB_EX5_EN: R47.1 U6.11 U11.3 | length 817.1
  Top Layer w8: U11.3 311.2,2077.51 R47.1
  Top Layer w10: R47.1 364.4,2130.71 cw(c435.11,2060) 435.11,2160 990.02,2160 ccw(c990.02,2186.61) U6.11
USB_EX6_5V: C33.1 P6.1 R45.2 U10.6 | length 756.5
  Top Layer w8: C33.1 C33.1@546,645.32
  Top Layer w10: R45.2 v2(363,864) ; P6.1 538,460 v2(538,588) 539.68,589.68 C33.1 539.68,721.45 U10.6
  Bottom Layer w10: v2(363,864) 363,763 v2(538,588)
USB_EX6_EN: R43.1 U6.12 U10.3 | length 1552.7
  Top Layer w8: U10.3 471.2,918.51 R43.1 cw(c490.58,937.9) 478,937.9 v2(478,1002) ; v2(592,1551) 592,1631.58 cw(c692,1631.58) 621.29,1702.29 1005.14,2086.14 ccw(c934.43,2156.85) 1034.43,2156.85 U6.12
  Bottom Layer w10: v2(478,1002) 562.71,1086.71 ccw(c492,1157.42) 592,1157.42 v2(592,1551)
USB_UP+: P1.3 R1.1 | length 351.7
  Top Layer w8: P1.3 1496,361.68 1496,483 1465,514 1465,574 1494,603 R1.1
USB_UP-: P1.2 R7.1 | length 266.5
  Top Layer w8: R7.1 1418,604 1447,575 1447,506.54 1478,475.54 1478,422.42 P1.2
USBDN1+: P2.3 R2.2 | length 384.4
  Top Layer w8: R2.2 2090,670 2117.5,642.5 2391.34,642.5 P2.3
USBDN1-: P2.2 R14.2 | length 380.9
  Top Layer w8: R14.2 2090,597 2117.5,624.5 2399.93,624.5 P2.2
USBDN2+: P3.3 R6.2 | length 387.1
  Top Layer w8: R6.2 2090,1442 2118.5,1413.5 2386,1413.5 P3.3
USBDN2-: P3.2 R15.2 | length 379.1
  Top Layer w8: R15.2 2090,1367 2118.5,1395.5 2405.26,1395.5 P3.2
USBDN3+: P5.3 R8.2 | length 378.1
  Top Layer w10: R8.2 2091,2239 2119,2211 2407.17,2211 P5.3
USBDN3-: P5.2 R16.2 | length 386.8
  Top Layer w10: R16.2 2091,2163 2119,2191 2386.09,2191 P5.2
USBDN4+: P4.3 R9.2 | length 384
  Top Layer w10: R9.2 2091,3000 2118.5,2972.5 2392.34,2972.5 P4.3
USBDN4-: P4.2 R17.2 | length 380.5
  Top Layer w10: R17.2 2091,2925 2118.5,2952.5 2400.92,2952.5 P4.2
USBDN5+: R10.2 U2.5 | length 615.1
  Top Layer w8: R10.2 1645,1877.32 1645,1914.46 1709,1978.46 1709,2329 1690,2348 1672,2348 1656,2332 U2.5
USBDN5-: R18.2 U2.6 | length 644.3
  Top Layer w8: U2.6 1656,2382 1672,2366 1697.46,2366 1727,2336.46 1727,1971 1663,1907 1663,1878 R18.2
USBDN6+: P7.3 R11.2 | length 201.8
  Top Layer w8: P7.3 429.66,1334.5 526.5,1334.5 555,1306 R11.2
USBDN6-: P7.2 R26.2 | length 203.4
  Top Layer w8: P7.2 431.07,1352.5 527.5,1352.5 556,1381 R26.2
USBDN7+: P6.3 R12.2 | length 383.4
  Top Layer w8: P6.3 634,443.16 634,509 696,571 769.71,571 807.29,608.58 807.29,609.98 830,632.68 R12.2
USBDN7-: P6.2 R28.2 | length 323.4
  Top Layer w8: P6.2 616,439.58 616,516.46 688.54,589 730.32,589 R28.2
VCC3V3: C3.1 C10.1 C11.2 C12.2 C13.2 C14.2 C15.2 C19.2 C22.2 C28.2 J5.1 L2.1 R13.2 R19.2 R31.2 R32.2 R34.2 R38.2 R39.2 R43.2 R47.2 R50.1 R57.1 U1.5 U1.10 U1.24 U1.46 U1.52 U1.57 U1.64 U2.16 U6.16 VR1.2 | length 12094.7
  Top Layer w8: R43.2 558,929 600,971 637.59,971 cw(c637.59,967.59) v2(640,970) 805,970 v2(835,940) ; v2(640,1545) 735.83,1545 809.32,1471.51 R19.2 ; v2(915,910) 1000,910 v2(1061,971) 1098.69,971 C10.1 1139,1044 1278.68,1183.68 U1.57 ; U1.46 1014.37,1303.37 998,1287 C11.2 v2(951.32,1223) 951.32,1177 C13.2 1079.18,1112 1180.25,1213.08 U1.52 ; U1.24 1278.68,1698.36 C14.2 ; U1.64 1575.21,1234.47 C22.2@1594.68,1215 ; 1428.26,1342.74 U1.5 1553.43,1342.74 v2(1570.68,1360) 1584.84,1374.16 1620.53,1374.16 C15.2 ; U1.10 1487.8,1441.17 1566.32,1519.68 C12.2 ; v2(1540,1155) 1564.68,1155 C22.2
  Top Layer w10: R47.2 ccw(c449.91,2155.6) 449.91,2060 v2(565,2060) R34.2 ; VR1.2@421.89,2470 421.89,2332.8 C19.2 ; VR1.2@658.11,2470 685,2470 750.76,2535.76 v2(829.08,2535.76) ; R32.2 v2@828.68,2534.8 ; L2.1 L2.1 908.32,2615 v2(829.08,2535.76) ; R50.1 1079.69,1865 v2(1095,1865) ; v2(1090,2045) 1142.68,2045 C28.2 1136.8,2051.52 U6.16 ; v2(1217.71,1728.29) 1247.64,1698.36 C14.2@1278.68,1698.36 ; R57.1 1391.69,1760.31 v2(1423.71,1728.29) ; U2.16 1409,2117.69 C3.1 1513.4,2013.29 ccw(c1584.11,2084) 1584.11,1984 1659,1984 v2(1660,1985) ; C12.2 1586.68,1519.68 v2(1636,1569) ; R38.2 1884,2786.17 cw(c1890.83,2786.17) v2(1886,2791) ; v2(1887,2030) 1887,1973.97 ccw(c1900.66,1973.97) R39.2 ; R13.2 1907.25,420.57 ccw(c1866.82,461) v2(1924,461) ; R31.2 1934.91,1235.23 ccw(c1908.13,1262) v2(1946,1262) ; v2@828.68,2534.8 cw(c830.05,2534.8) v2(829.08,2535.76) ; v2@828.68,2534.8 828.68,2535.37 v2(829.08,2535.76)
  Top Layer w20: VR1.2@421.89,2470 v2(566,2470) VR1.2@658.11,2470
  Bottom Layer w8: J5.1 176.71,2317.71 cw(c247.42,2247) 247.42,2347 566,2347 566,2464 v2(566,2470) ; v2(835,940) 865,910 v2(915,910) ; v2(951.32,1223) 1031.71,1142.6 cw(c961,1071.89) 1061,1071.89 v2(1061,971) ; v2(1540,1155) 1636,1251 1636,1360 v2(1570.68,1360)
  Bottom Layer w10: 566,2347 566,2062.41 cw(c562.59,2062.41) v2(565,2060) 610.71,2014.29 cw(c540,1943.58) 640,1943.58 v2(640,1545) v2(640,970) ; v2@566,2464 560,2470 v2(566,2470) ; v2(829.08,2535.76) 829.08,2305.92 v2(1090,2045) ; v2(1435,2092) 1417.29,2074.29 cw(c1346.58,2145) 1346.58,2045 v2(1090,2045) ; 1636,1360 v2(1636,1569) 1583,1569 v2(1423.71,1728.29) v2(1217.71,1728.29) 1095,1851 v2(1095,1865) 1090,1870 v2(1090,2045) ; v2(1660,1985) 1800.58,1985 ccw(c1800.58,2085) 1871.29,2014.29 v2(1887,2030) ; v2(1886,2791) 1886,2032.41 ccw(c1889.41,2032.41) v2(1887,2030) ; v2(1924,461) ccw(c1870.89,514.11) 1946,514.11 v2(1946,1262) ccw(c1933.93,1274.07) 1951,1274.07 1951,1609.47 ccw(c1872.47,1609.47) 1928,1665 1916.29,1676.71 cw(c1987,1747.42) 1887,1747.42 v2(1887,2030)
VCC5V: C1.1 C6.1 C9.1 C21.2 C23.1 C24.1 C32.1 C34.1 C43.2 C45.2 L1.2 R21.2 R23.2 U3.1 U5.1 U5.3 U5.4 U7.1 U8.1 U9.1 U10.1 U11.1 VR1.3 | length 14879.4
  Top Layer w10: v2(386,2035) U11.1 400.68,1975.32 C34.1 ; U10.1 558.68,825.32 C32.1 631,885.59 cw(c634.41,885.59) v2(632,888) ; U3.1 v2(1982,464) 1982,500.32 C1.1@1993.68,512 ; U7.1 v2(1982,1232) 1982,1260.32 C6.1 ; U9.1 v2(1982,2012) 1982,2041.32 C24.1 ; U8.1 v2(1982,2792) 1982,2820.32 C23.1
  Top Layer w15: U5.3 452.59,3189 ccw(c452.59,3192.41) 455,3190 ; U5.1 455,3240 455,3190 ; R21.2 660,2800 ; VR1.3@660,2565.11 cw(c653.55,2565.11) VR1.3 660,2800 ; L1.2 782.4,2930.63 cw(c711.69,3001.34) 711.69,2901.34 C9.1 ; R23.2@1770,3240 1867,3143 1867,3005 1782,2920 1640,2920 1400,2680 920,2680 800,2800 660,2800 ; 455,3190 455,3165 cw(c450.17,3169.83) 450.17,3163 U5.4 324.31,3163 ccw(c324.31,3135.69) 305.01,3155.01 297.93,3147.93 ccw(c317.07,3128.79) 290,3128.79 290,2965 330.8,2924.2 ccw(c390,2983.42) C45.2 cw(c393.99,2895.69) 393.99,2901.34 C9.1 ; 660,2800 C9.1
  Top Layer w20: v2@52,925 52,2588.58 cw(c152,2588.58) 81.29,2659.29 130.71,2708.71 cw(c201.42,2638) 201.42,2738 225.58,2738 cw(c225.58,2638) 296.29,2708.71 350.71,2654.29 ccw(c421.42,2725) 421.42,2625 430,2625 cw(c430,2552.57) 481.21,2603.79 500,2585 ccw(c559.02,2644.02) 559.02,2560.55 VR1.3 ; v2(930,714) 1029.71,614.29 cw(c959,543.58) 1059,543.58 1059,246.42 ccw(c1159,246.42) 1088.29,175.71 1189,75 ccw(c1213.14,99.14) 1213.14,65 v2(1946,65) 2332,65 2372,105 ; 2373.29,106.29 2658,391 v2(2658,1034) v2(2658,1790) v2@2658,2582
  Bottom Layer w10: v2(54,2033) cw(c58.83,2028.17) 58.83,2035 v2(386,2035) ; v2@624.29,895.71 v2(632,888) ; v2(1946,65) 1946,386.58 cw(c2046,386.58) 1975.29,457.29 v2(1982,464) ; v2(1982,1232) 2201.58,1232 cw(c2201.58,1132) 2272.29,1202.71 2411.71,1063.29 ccw(c2482.42,1134) 2482.42,1034 v2(2658,1034) ; v2(1982,2012) 2219.58,2012 cw(c2219.58,1912) 2290.29,1982.71 2453.71,1819.29 ccw(c2524.42,1890) 2524.42,1790 v2(2658,1790) ; v2(1982,2792) 1997.71,2807.71 cw(c2068.42,2737) 2068.42,2837 2253,2837 2324.71,2765.29 cw(c2254,2694.58) 2354,2694.58 2354,2675 2417.71,2611.29 ccw(c2488.42,2682) 2488.42,2582 v2(2661,2582)
  Bottom Layer w20: v2(49,925) 553.58,925 cw(c553.58,825) v2@624.29,895.71 ; v2(632,888) 776.71,743.29 ccw(c847.42,814) 847.42,714 v2(930,714)
VCC24V: C8.1 C30.1 J3.2 J4.2 R22.2 U4.6 U4.7 U4.8 | length 1685.4
  Top Layer w30: U4.7 1191.46,3360 ; R22.2 1191.77,3360.32 1191.46,3360 ; C30.1@1571.73,3588 ccw(c1571.73,3557.27) C30.1 ; J3.2 J4.2 1846,3283 C30.1 ; 1191.46,3360 1191.46,3492.8 C8.1 1282.34,3579 C30.1
VDD18: C38.2 C39.2 U1.25 | length 262.9
  Top Layer w8: C38.2 C39.2 1258.99,1636.69 U1.25
VDD18PLL: C36.2 C37.2 U1.62 | length 436
  Top Layer w8: U1.62 1377.1,1202.9 1490,1090 1580,1090 1625,1045 C37.2 1699,1029.32 C36.2
VDDA: C26.2 C27.2 L2.2 U6.5 | length 330.6
  Top Layer w10: L2.2 1129.28,2544.96 C27.2 1136.8,2546.89 U6.5
VOUT: D11.2 P8.1 R58.1 U5.5 U5.8 | length 935.1
  Top Layer w15: R58.1 554,3318 602,3270 U5.8 ; U5.5 564.83,3163 cw(c564.83,3169.83) 560,3165 cw(c572.07,3177.07) 555,3177.07 555,3235 cw(c567.07,3222.93) 567.07,3240 U5.8 ; P8.1 cw(c833.5,3518) 893.25,3458.25 792.07,3357.07 ccw(c809.14,3340) D11.2 785,3299.14 cw(c750.86,3299.14) 775,3275 769.29,3269.29 cw(c698.58,3340) 698.58,3240 U5.8
pads on no net: P8.2 P8.3 U1.14 U1.15 U1.16 U1.17 U1.18 U1.20 U1.21 U1.22 U1.23 U1.26 U1.27 U1.28 U1.29 U1.30 U1.31 U1.32 U1.33 U1.34 U1.35 U1.36 U1.37 U1.38 U1.39 U1.40 U1.47 U1.48 U1.49 U1.50 U1.51 U2.4 U2.7 U2.8 U2.9 U2.10 U2.11 U2.12 U2.13 U2.14 U2.15 U3.4 U4.9 U4.12 U4.17 U4.18 U6.10 U7.4 U8.4 U9.4 U10.4 U11.4

## Polygon pours and split planes (outlines as drawn)
NetC17_2 on Top Layer "Bottom Layer-No Net" (solid, remove dead copper, pour order 4): 1114.68,2910.59 1114.68,3135 1114.68,3181.62 ccw(c1081.62,3181.62) 1105,3205 ccw(c1092.93,3192.93) 1092.93,3210 1050,3210 979.14,3210 ccw(c979.14,3175.86) 955,3200 ccw(c1003.28,3151.72) 935,3151.72 935,3065 935,2909.14 ccw(c969.14,2909.14) 945,2885 ccw(c1005.36,2945.36) 1005.36,2860 1020,2860 1070.86,2860 ccw(c1070.86,2894.14) 1095,2870 1099.9,2874.9 ccw(c1064.21,2910.59) 1114.68,2910.59
GND on Top Layer "Bottom Layer-No Net" (solid, remove dead copper, pour order 6): 20,720 20,560 ccw(c116.57,560) 48.28,491.72 260,280 490.71,49.29 ccw(c561.42,120) 561.42,20 660,20 2258.58,20 ccw(c2258.58,120) 2329.29,49.29 2580,300 2630.71,350.71 ccw(c2560,421.42) 2660,421.42 2660,500 2660,3418.58 ccw(c2560,3418.58) 2630.71,3489.29 2380,3740 2269.29,3850.71 ccw(c2198.58,3780) 2198.58,3880 2020,3880 661.42,3880 ccw(c661.42,3780) 590.71,3850.71 320,3580 49.29,3309.29 ccw(c120,3238.58) 20,3238.58 20,3180 20,700
GND on Bottom Layer "Bottom Layer-No Net" (solid, remove dead copper, pour order 5): 20,720 20,560 ccw(c116.57,560) 48.28,491.72 260,280 490.71,49.29 ccw(c561.42,120) 561.42,20 660,20 2258.58,20 ccw(c2258.58,120) 2329.29,49.29 2580,300 2630.71,350.71 ccw(c2560,421.42) 2660,421.42 2660,500 2660,3418.58 ccw(c2560,3418.58) 2630.71,3489.29 2380,3740 2269.29,3850.71 ccw(c2198.58,3780) 2198.58,3880 2020,3880 661.42,3880 ccw(c661.42,3780) 590.71,3850.71 320,3580 49.29,3309.29 ccw(c120,3238.58) 20,3238.58 20,3180 20,700

## Other copper
Top Layer:
  rectangle net VCC24V: 1160,3110 1215,3155
  pour cut-out: 1415,1210 1505,1120 1529.68,1120 1590,1180.32 1589.68,1180.63 1589.68,1220 1585,1220 1550,1255 1540,1245 1430,1245 1430,1225
  pour cut-out: 1095,2185 1095,2230 1080,2245 935,2245 935,2210 904,2179 928,2155 1065,2155
  pour cut-out: 1044.27,1572.4 1045.36,1573.49 1103.48,1573.49 1103.48,1453.48 1045,1395 1044.27,1395.73
  pour cut-out: 1300,1920 1320,1940 1508,1752 1492,1752 1480,1740 1305,1915 1305,1924.27
  pour cut-out: 1300,1920 1320,1940 1490,1770 1500,1770 1500,1760 1480,1740 1305,1915 1305,1919.64
  pour cut-out: 982.99,1767.99 970,1755 970,1570 1010,1530 1020,1540 1030,1540 1030,1765 1025,1770 1022.99,1767.99
  pour cut-out: 1174.58,60.58 cw(c1173.57,59.57) 1175,59.57 1175,10 2373.58,10 ccw(c2373.58,110) 2444.29,39.29 2475,70 ccw(c2462.93,82.07) 2480,82.07 2480,165 2444.14,165 ccw(c2444.14,130.86) 2420,155 2333.54,68.54 cw(c2325,77.07) 2325,65 2134.14,65 ccw(c2134.14,30.86) 2110,55 ccw(c2096.53,41.53) 2096.53,60.58
Bottom Layer:
  pour cut-out: 1493.45,1816.49 1493.45,1695.9 cw(c1490.04,1695.9) 1492.45,1693.49 cw(c1496.1,1689.84) 1496.1,1695 1730,1695 cw(c1730,1670.86) 1747.07,1687.93 1885,1550 ccw(c1954,1481) 1856.42,1481 1856.42,297.09 cw(c1856.42,291.16) 1860.61,295.35 1897.51,258.45 cw(c1901.24,254.72) 1901.24,260 1946,260 1946,1617.58 ccw(c1846,1617.58) 1916.71,1688.29 1907.8,1697.2 cw(c1958.03,1747.42) 1887,1747.42 1887,1920 cw(c1874.93,1932.07) 1874.93,1915 1830,1915 cw(c1805.86,1915) 1822.93,1897.93 1765,1840 cw(c1728.79,1876.21) 1728.79,1825 1514,1825 ccw(c1514,1795.94)

## Silkscreen, mask and mechanical layers (free items; w line width, h text height)
Top Overlay:
  text "PC POWER" at 591,3389 h39.37
  text "1" at 2255,3060 h78.74
  text "2021/03/24" at 129,2873 h30.05 r90
  text "HUB_CONTROL_V1.1" at 207,2803 h30 r90
  text "2" at 2235,2315 h78.74
  text "3" at 2240,1520 h78.74
  text "6" at 505,1075 h78.74
  text "4" at 2255,765 h78.74
  text "5" at 930,495 h78.74
Top Paste:
  rectangle: 1160,2979 1308,3061
Top Solder:
  rectangle: 1160,2979 1308,3061
Mechanical 1:
  lines w7.87: 0,0 0,3899 2797,3899 2797,0 0,0